# EAGLE board csc347 lab 3 bit adder (EAGLE 7.6.0)

Size 56.82 x 53.33 mm. Coordinates in mm from the lower left corner, seen from the top.
Outline: 0,0 56.82,0 56.82,53.33 0,53.33 0,0
Copper layers (1*16): Top 0.035mm / dielectric 1.5mm / Bottom 0.035mm
Design rules "default": minimum track width 10mil, minimum drill 24mil, track to track 8mil, track to pad 8mil, pad to pad 8mil, via to via 8mil, smd to smd 8mil, copper to edge 40mil, drill to drill 8mil, minimum pad ring 10mil, minimum via ring 8mil, stop-mask expansion 4mil, vias tented up to drill 0mil, thermal gap 10mil

## Footprints (pad centres in the part's own frame; a part is rotated, then mirrored left to right if it is on the bottom)
LED5MM = drill 0.813 octagon: A -1.27,0; K 1.27,0
2P-2.54-65/35MIL = drill 0.889 pad 1.651 square: 1 0,1.27 | drill 0.889 pad 1.651: 2 0,-1.27
0207/10 = drill 0.813 octagon: 1 -5.08,0; 2 5.08,0
DIP06YL = drill 0.813 long: 1 -6.35,-3.81; 2 -3.81,-3.81; 3 -1.27,-3.81; 4 1.27,-3.81; 5 3.81,-3.81; 6 6.35,-3.81; 7 6.35,3.81; 8 3.81,3.81; 9 1.27,3.81; 10 -1.27,3.81; 11 -3.81,3.81; 12 -6.35,3.81
DIL14 = drill 0.813 long: 1 -7.62,-3.81; 2 -5.08,-3.81; 3 -2.54,-3.81; 4 0,-3.81; 5 2.54,-3.81; 6 5.08,-3.81; 7 7.62,-3.81; 8 7.62,3.81; 9 5.08,3.81; 10 2.54,3.81; 11 0,3.81; 12 -2.54,3.81; 13 -5.08,3.81; 14 -7.62,3.81

## Placement (x,y rotation side)
D1  [LED5MM]  5,22.78 0 top
D2  [LED5MM]  5,35.48 0 top
D3  [LED5MM]  5,48.18 0 top
D4  [LED5MM]  5,60.88 0 top  (outside the outline)
P3  4V  [2P-2.54-65/35MIL]  5,10.08 0 top
R1  100‎Ω  [0207/10]  5,73.58 0 top  (outside the outline)
R2  100‎Ω  [0207/10]  5,86.28 0 top  (outside the outline)
R3  100‎Ω  [0207/10]  5,98.98 0 top  (outside the outline)
R4  100‎Ω  [0207/10]  5,111.68 0 top  (outside the outline)
R5  100‎Ω  [0207/10]  5,149.78 0 top  (outside the outline)
R6  100‎Ω  [0207/10]  5,162.48 0 top  (outside the outline)
R7  100‎Ω  [0207/10]  5,175.18 0 top  (outside the outline)
R8  100‎Ω  [0207/10]  5,187.88 0 top  (outside the outline)
R9  100‎Ω  [0207/10]  5,200.58 0 top  (outside the outline)
R10  100‎Ω  [0207/10]  5,137.08 0 top  (outside the outline)
SW1  [DIP06YL]  5,124.38 0 top  (outside the outline)
U1  [DIL14]  5,213.28 0 top  (outside the outline)
U2  [DIL14]  5,225.98 0 top  (outside the outline)
U3  [DIL14]  5,238.68 0 top  (outside the outline)
U4  [DIL14]  5,251.38 0 top  (outside the outline)

## Library data of the parts
D1-D4 P3 R1-R10 SW1 U1-U4 = AUTODESK_CIRCUITS_BREADBOARD

## Nets
N$1: D1.A R1.2
N$2: D3.A R3.2
N$3: D4.A R4.2
N$4: D2.A R2.2
N$5: R10.1 SW1.6
N$6: R5.1 SW1.5
N$7: R1.1
N$8: R2.1
N$9: R3.1 U2.3
N$10: U4.13
N$11: U4.7
N$12: R4.1 U4.8
N$13: U4.12
N$14: U4.6 U4.9
N$15: R8.1 SW1.2 U1.5 U4.1 U4.5
N$16: U4.11
N$17: D1.K D2.K D3.K D4.K P3.1 R5.2 R6.2 R7.2 R8.2 R9.2 R10.2 U1.7 U2.7 U3.7
N$18: U1.2 U4.3
N$19: U1.3 U2.2
N$20: U1.9
N$21: U1.11
N$22: U1.12
N$23: U1.6 U2.1
N$24: U1.8
N$25: U1.10
N$26: U1.13
N$27: U2.5
N$28: U2.11
N$29: U2.12
N$30: U2.4
N$31: U2.13
N$32: U2.6
N$33: U2.8
N$34: U2.9
N$35: U2.10
N$36: U3.13
N$37: U3.8
N$38: U3.12
N$39: U3.2
N$40: U3.5
N$41: U3.1
N$42: U3.3
N$43: U3.6
N$44: U3.9
N$45: U3.4
N$46: U3.10
N$47: U3.11
N$48: P3.2 SW1.7 SW1.8 SW1.9 SW1.10 SW1.11 SW1.12 U1.14 U2.14 U3.14 U4.14
N$49: R6.1 SW1.4
N$50: R7.1 SW1.3 U1.1 U4.10
N$51: R9.1 SW1.1 U1.4 U4.2 U4.4

## Tracks (layer width: path | path; a pad name or v marks a point on that pad's centre or on a via)
N$1  (1 unrouted)
N$2  (1 unrouted)
N$3  (1 unrouted)
N$4  (1 unrouted)
N$5  (1 unrouted)
N$6  (1 unrouted)
N$9  (1 unrouted)
N$12  (1 unrouted)
N$14  (1 unrouted)
N$15  (4 unrouted)
N$17  (13 unrouted)
N$18  (1 unrouted)
N$19  (1 unrouted)
N$23  (1 unrouted)
N$48  (10 unrouted)
N$49  (1 unrouted)
N$50  (3 unrouted)
N$51  (4 unrouted)